# EAGLE board gL_control_PCB (EAGLE 7.7.0)
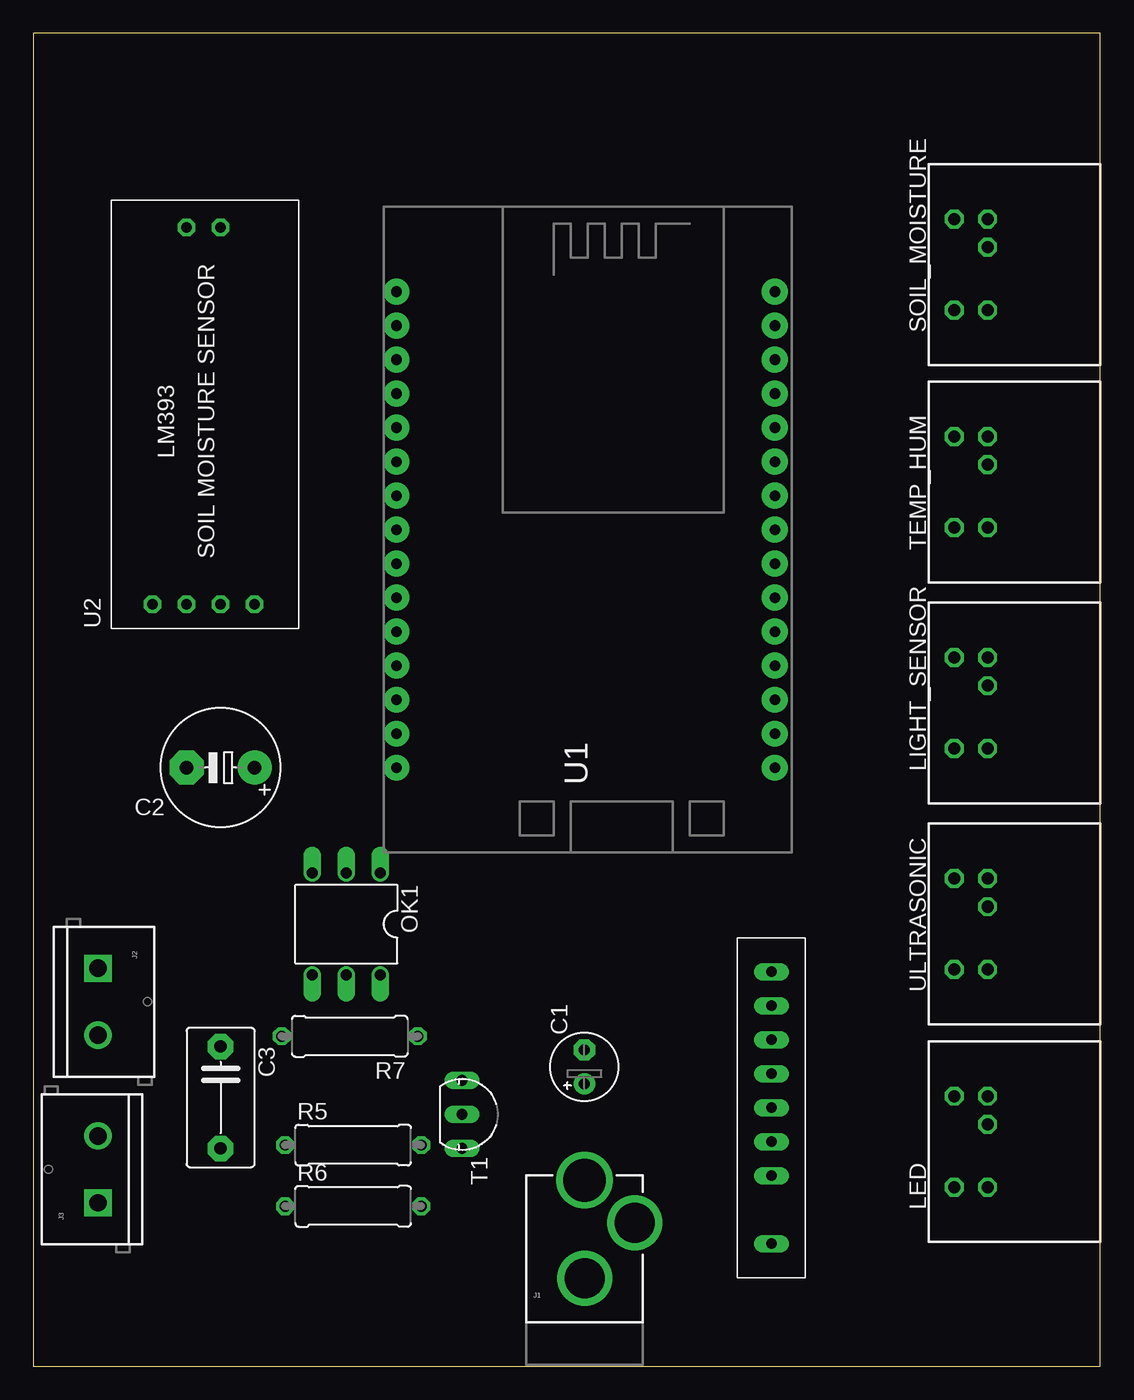
[diagram p0: board, top side]
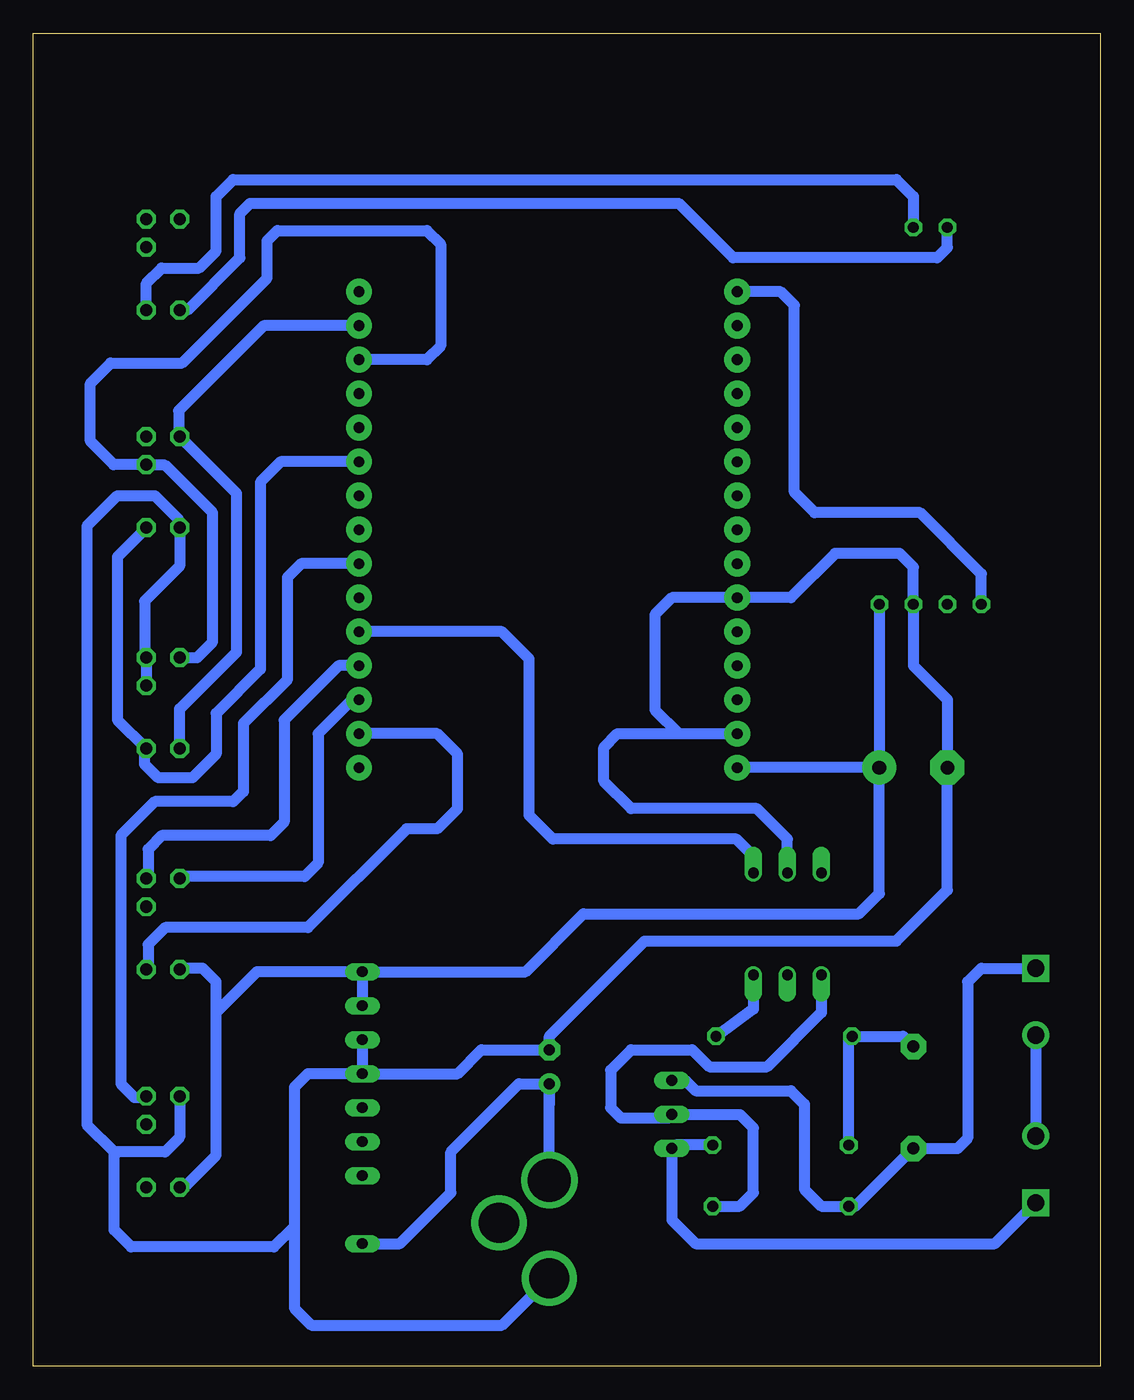
[diagram p1: board, bottom side, seen from below]

Size 79.68 x 99.56 mm. Coordinates in mm from the lower left corner, seen from the top.
Outline: 0,0 79.68,0 79.68,99.56 0,99.56 0,0
Copper layers (1*16): Top 0.035mm / dielectric 1.5mm / Bottom 0.035mm
Design rules "default": minimum track width 10mil, minimum drill 24mil, track to track 8mil, track to pad 8mil, pad to pad 8mil, via to via 8mil, smd to smd 8mil, copper to edge 40mil, drill to drill 8mil, minimum pad ring 10mil, minimum via ring 8mil, stop-mask expansion 4mil, vias tented up to drill 0mil, thermal gap 10mil

## Footprints (pad centres in the part's own frame; a part is rotated, then mirrored left to right if it is on the bottom)
E2,5-5 = drill 0.813 pad 1.6: + -1.27,0 | drill 0.813 pad 1.6 octagon: - 1.27,0
E5-8,5 = drill 1.016 pad 2.54: + -2.54,0 | drill 1.016 pad 2.54 octagon: - 2.54,0
C7.5B5 = drill 0.914 pad 1.905 octagon: 1 -3.81,0; 2 3.81,0
POWER_JACK_PTH_LOCK = drill 2.997 pad 4.115: GND 0.025,6.557; GNDBREAK 3.762,10.7 | drill 3.2 pad 4.115: PWR 0,13.878
SCREWTERMINAL-5MM-2 = drill 1.3 pad 2.032 square: 1 0,0 | drill 1.3 pad 2.032: 2 5,0
MDIN05SS = drill 0.9 octagon: 1 1.3,8.5; 2 3.4,8.5; 3 -3.4,8.5; 4 3.4,11; 5 -3.4,11
DIL06 = drill 0.813 offset: 1 -2.54,-3.81; 2 0,-3.81; 3 2.54,-3.81; 4 2.54,3.81; 5 0,3.81; 6 -2.54,3.81
0309/10 = drill 0.813 octagon: 1 -5.08,0; 2 5.08,0
TO92-3 = drill 0.813 long: A1 2.54,0; A2 -2.54,0; G 0,0
ESP12E_DEVKIT = drill 0.8 pad 1.93: 3V3@0 -16.828,-7.62; 3V3@1 11.43,5.08; 3V3@2 11.43,-17.78; AD0 -16.828,17.78; CLK -16.828,-2.54; CMD -16.828,2.54; D0 11.43,17.78; D1 11.43,15.24; D2 11.43,12.7; D3 11.43,10.16; D4 11.43,7.62; D5 11.43,0; D6 11.43,-2.54; D7 11.43,-5.08; D8 11.43,-7.62; EN -16.828,-10.16; GND@0 -16.828,-5.08; GND@1 -16.828,-15.24; GND@2 11.43,2.54; GND@3 11.43,-15.24; RST -16.828,-12.7; RSV@0 -16.828,15.24; RSV@1 -16.828,12.7; RX 11.43,-10.16; SD0 -16.828,0; SD1 -16.828,5.08; SD2 -16.828,7.62; SD3 -16.828,10.16; TX 11.43,-12.7; VIN -16.828,-17.78
LM393_SOIL_SENSOR = drill 0.8 octagon: AO 1.8,10.92; DO 1.8,8.38; GND 1.8,5.84; GND_OUT 29.94,8.38; SIGNAL_OUT 29.94,5.84; VCC 1.8,3.3
BH5220A = drill 0.8 long: ADJ 3.81,0; CTL -1.27,0; FB -8.89,0; GND -3.81,0; NC 1.27,0; NC1 6.35,0; VIN 11.43,0; VOUT -6.35,0

## Placement (x,y rotation side)
C1  [E2,5-5]  41.15,22.35 90 top
C2  [E5-8,5]  13.97,44.7 180 top
C3  100n  [C7.5B5]  13.97,20.07 270 top
J1  POWER_JACKPTH_LOCK  [POWER_JACK_PTH_LOCK]  41.15,0 0 top
J2  fromOutlet  [SCREWTERMINAL-5MM-2]  4.83,29.72 270 top
J3  toMotor  [SCREWTERMINAL-5MM-2]  4.83,12.19 90 top
LED  [MDIN05SS]  79.76,16.76 90 top
LIGHT_SENSOR  [MDIN05SS]  79.76,49.53 90 top
OK1  MOC3020M  [DIL06]  23.37,33.02 180 top
R5  2k2  [0309/10]  23.88,16.51 0 top
R6  10k  [0309/10]  23.88,11.94 0 top
R7  180  [0309/10]  23.62,24.64 180 top
SOIL_MOISTURE  [MDIN05SS]  79.76,82.3 90 top
T1  T08-6A  [TO92-3]  32,18.8 270 top
TEMP_HUM  [MDIN05SS]  79.76,66.04 90 top
U1  ESP12E_DEVKIT  [ESP12E_DEVKIT]  43.94,62.48 0 top
U2  LM393_SOIL_MOISTURE  [LM393_SOIL_SENSOR]  19.81,55.12 90 top
U$1  BH5220A  [BH5220A]  55.12,20.57 270 top
ULTRASONIC  [MDIN05SS]  79.76,33.02 90 top

## Library data of the parts
C1 C2 R5-R7 = resistor
C3 = capacitor-wima
J1 = SparkFun-Connectors; PROD_ID: CONN-08197; SF_ID: PRT-00119
J2 J3 = SparkFun-Connectors; STOREFRONT_ID: PRT-08432
LED LIGHT_SENSOR SOIL_MOISTURE TEMP_HUM ULTRASONIC = con-yamaichi; OC_FARNELL: unknown; OC_NEWARK: unknown
OK1 = optocoupler; MF: FAIRCHILD SEMICONDUCTOR; MPN: MOC3020-M; OC_FARNELL: 1505425; OC_NEWARK: 72K8895
T1 = triac
U1 = ESP12E_DEVKIT
U2 = soil_moisture_sensor
U$1 = bh5220a

## Nets
3V3: LIGHT_SENSOR.3 TEMP_HUM.3 U1.3V3@1
AD0: U1.AD0 U2.AO
DO_LED: LED.2 U1.D6
DO_PUMP: OK1.1 U1.D8
GND: C1.- C2.- J1.GND LED.4 LIGHT_SENSOR.1 LIGHT_SENSOR.2 OK1.2 TEMP_HUM.5 U1.GND@1 U2.GND U$1.CTL U$1.GND
N$1: SOIL_MOISTURE.5 U2.GND_OUT
N$2: U1.GND@3 ULTRASONIC.3
N$3: SOIL_MOISTURE.3 U2.SIGNAL_OUT
N$5: U1.TX ULTRASONIC.4
N$6: U1.RX ULTRASONIC.2
N$20: J2.2 J3.2
N$23: C3.2 J2.1 R6.1 T1.A2
N$24: J3.1 R5.2 T1.A1
N$25: OK1.6 R7.1
N$26: C3.1 R5.1 R7.2
N$27: OK1.4 R6.2 T1.G
SCL: LIGHT_SENSOR.5 TEMP_HUM.4 U1.D1
SDA: LIGHT_SENSOR.4 TEMP_HUM.1 U1.D2
VCC_REG: C2.+ LED.5 U1.VIN U2.VCC U$1.FB U$1.VOUT ULTRASONIC.5
VIN: C1.+ J1.PWR U$1.VIN

## Tracks (layer width: path | path; a pad name or v marks a point on that pad's centre or on a via)
3V3
  Bottom 0.813: U1.3V3@1 61.21,67.56 62.74,66.04 62.74,52.07 66.04,48.77 66.04,45.72 67.82,43.94 70.36,43.94 71.37,44.96 71.37,46.01 LIGHT_SENSOR.3 73.41,48.28 73.41,60.45 71.26,62.6 TEMP_HUM.3
AD0
  Bottom 0.813: U2.AO 8.89,59.18 13.46,63.75 21.34,63.75 22.86,65.28 22.86,79.25 23.88,80.26 U1.AD0
DO_LED
  Bottom 0.813: LED.2 71.35,20.07 72.14,20.07 73.15,21.08 73.15,39.62 70.61,42.16 64.77,42.16 64.01,42.93 64.01,48.01 60.71,51.31 60.71,58.93 59.69,59.94 U1.D6
DO_PUMP
  Bottom 0.813: OK1.1 25.91,38.1 27.18,39.37 40.89,39.37 42.67,41.15 42.67,52.83 44.7,54.86 U1.D8
GND
  Bottom 0.813: LED.4 68.76,17.1 69.85,16 73.41,16 | 73.41,16 73.66,16 75.69,18.03 75.69,62.74 73.41,65.02 70.61,65.02 68.83,63.25 68.83,62.72 TEMP_HUM.5 68.76,59.77 71.37,57.15 71.37,53.05 LIGHT_SENSOR.2 LIGHT_SENSOR.1 | 73.41,16 73.66,15.75 73.66,10.16 72.39,8.89 61.72,8.89 60.2,10.41 | 30.48,47.24 U1.GND@1 31.5,47.24 | OK1.2 23.37,39.37 25.65,41.66 35.05,41.66 37.08,43.69 37.08,46.23 36.07,47.24 31.5,47.24 | 31.5,47.24 33.27,49.02 33.27,56.13 32,57.4 23.11,57.4 19.81,60.71 14.99,60.71 13.97,59.69 U2.GND 13.97,52.33 11.43,49.78 C2.- 11.43,35.56 15.24,31.75 34.04,31.75 41.15,24.64 C1.- 46.23,23.62 48.01,21.84 U$1.CTL | U$1.CTL 59.18,21.84 60.2,20.83 60.2,10.41 | U$1.GND U$1.CTL | 60.2,10.41 60.2,4.32 58.93,3.05 44.68,3.05 J1.GND
N$1
  Bottom 0.813: SOIL_MOISTURE.5 68.17,78.9 64.26,82.8 64.26,86.11 63.5,86.87 31.5,86.87 27.43,82.8 12.19,82.8 11.43,83.57 U2.GND_OUT
N$2
  Bottom 0.813: ULTRASONIC.3 71.12,29.76 71.12,31.5 69.85,32.77 59.18,32.77 51.82,40.13 49.53,40.13 48.01,41.66 48.01,45.72 49.53,47.24 U1.GND@3
N$3
  Bottom 0.813: SOIL_MOISTURE.3 71.26,80.89 70.1,82.04 67.31,82.04 66.04,83.31 66.04,87.38 64.77,88.65 15.24,88.65 13.97,87.38 U2.SIGNAL_OUT
N$5
  Bottom 0.813: U1.TX 55.88,49.78 58.42,47.24 58.42,37.59 59.44,36.58 68.6,36.58 ULTRASONIC.4
N$6
  Bottom 0.813: U1.RX 56.9,52.32 60.96,48.26 60.96,40.64 61.98,39.62 70.1,39.62 71.12,38.61 71.12,36.56 ULTRASONIC.2
N$20
  Bottom 0.813: J2.2 J3.2
N$23
  Bottom 0.813: J2.1 8.89,29.72 9.91,28.7 9.91,17.02 10.67,16.26 C3.2 18.29,11.94 R6.1 20.83,11.94 22.1,13.21 22.1,19.56 23.11,20.57 30.23,20.57 30.99,21.34 T1.A2
N$24
  Bottom 0.813: J3.1 7.87,9.14 30.23,9.14 32,10.92 T1.A1 31.75,16.51 R5.2
N$25
  Bottom 0.813: OK1.6 25.91,26.67 R7.1
N$26
  Bottom 0.813: R5.1 18.8,24.38 R7.2 14.73,24.64 C3.1
N$27
  Bottom 0.813: OK1.4 20.83,26.42 24.89,22.35 29.21,22.35 30.48,23.62 35.05,23.62 36.58,22.1 36.58,19.3 35.81,18.54 32.26,18.54 T1.G 26.92,18.8 25.91,17.78 25.91,12.95 26.92,11.94 R6.2
SCL
  Bottom 0.813: U1.D1 62.48,77.72 68.83,71.37 68.83,69.52 TEMP_HUM.4 64.52,65.2 64.52,53.34 68.76,49.1 LIGHT_SENSOR.5
SDA
  Bottom 0.813: LIGHT_SENSOR.4 67.47,52.93 66.29,54.1 66.29,63.75 69.85,67.31 71.23,67.31 TEMP_HUM.1 73.69,67.34 75.44,69.09 75.44,73.41 73.91,74.93 68.58,74.93 62.23,81.28 62.23,84.07 61.47,84.84 50.29,84.84 49.28,83.82 49.28,76.2 50.29,75.18 U1.D2
VCC_REG
  Bottom 0.813: LED.5 68.42,13.36 66.04,15.75 66.04,26.42 | 66.04,26.42 66.04,28.7 67.06,29.72 68.66,29.72 ULTRASONIC.5 | U$1.FB U$1.VOUT | U$1.FB 62.99,29.46 66.04,26.42 | C2.+ U1.VIN | U2.VCC 16.51,56.9 C2.+ | U$1.FB 42.93,29.46 38.61,33.78 18.03,33.78 16.51,35.31 C2.+
VIN
  Bottom 0.813: C1.+ 41.15,19.56 | J1.PWR C1.+ | U$1.VIN 52.32,9.14 48.51,12.95 48.51,16 43.43,21.08 C1.+